# EAGLE board zx80 SD_12 (smd) build004 (EAGLE 9.6.2), part 1 of 2
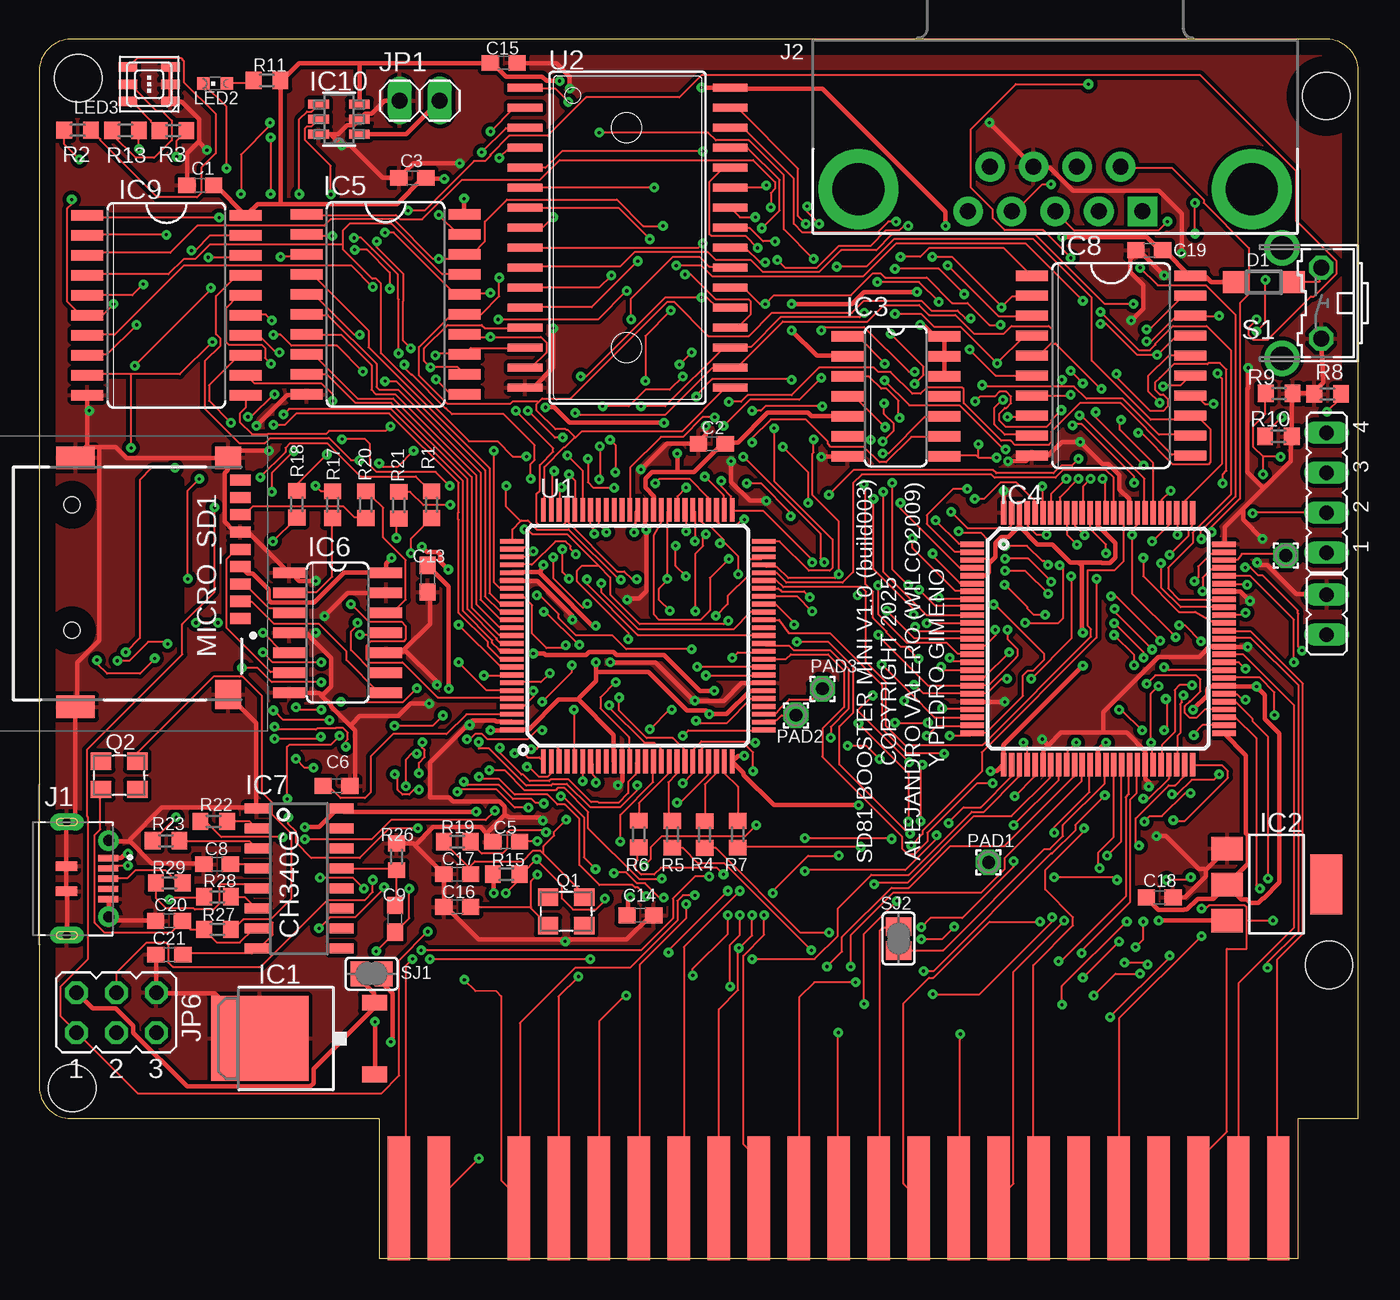
[diagram p0: board, top side]
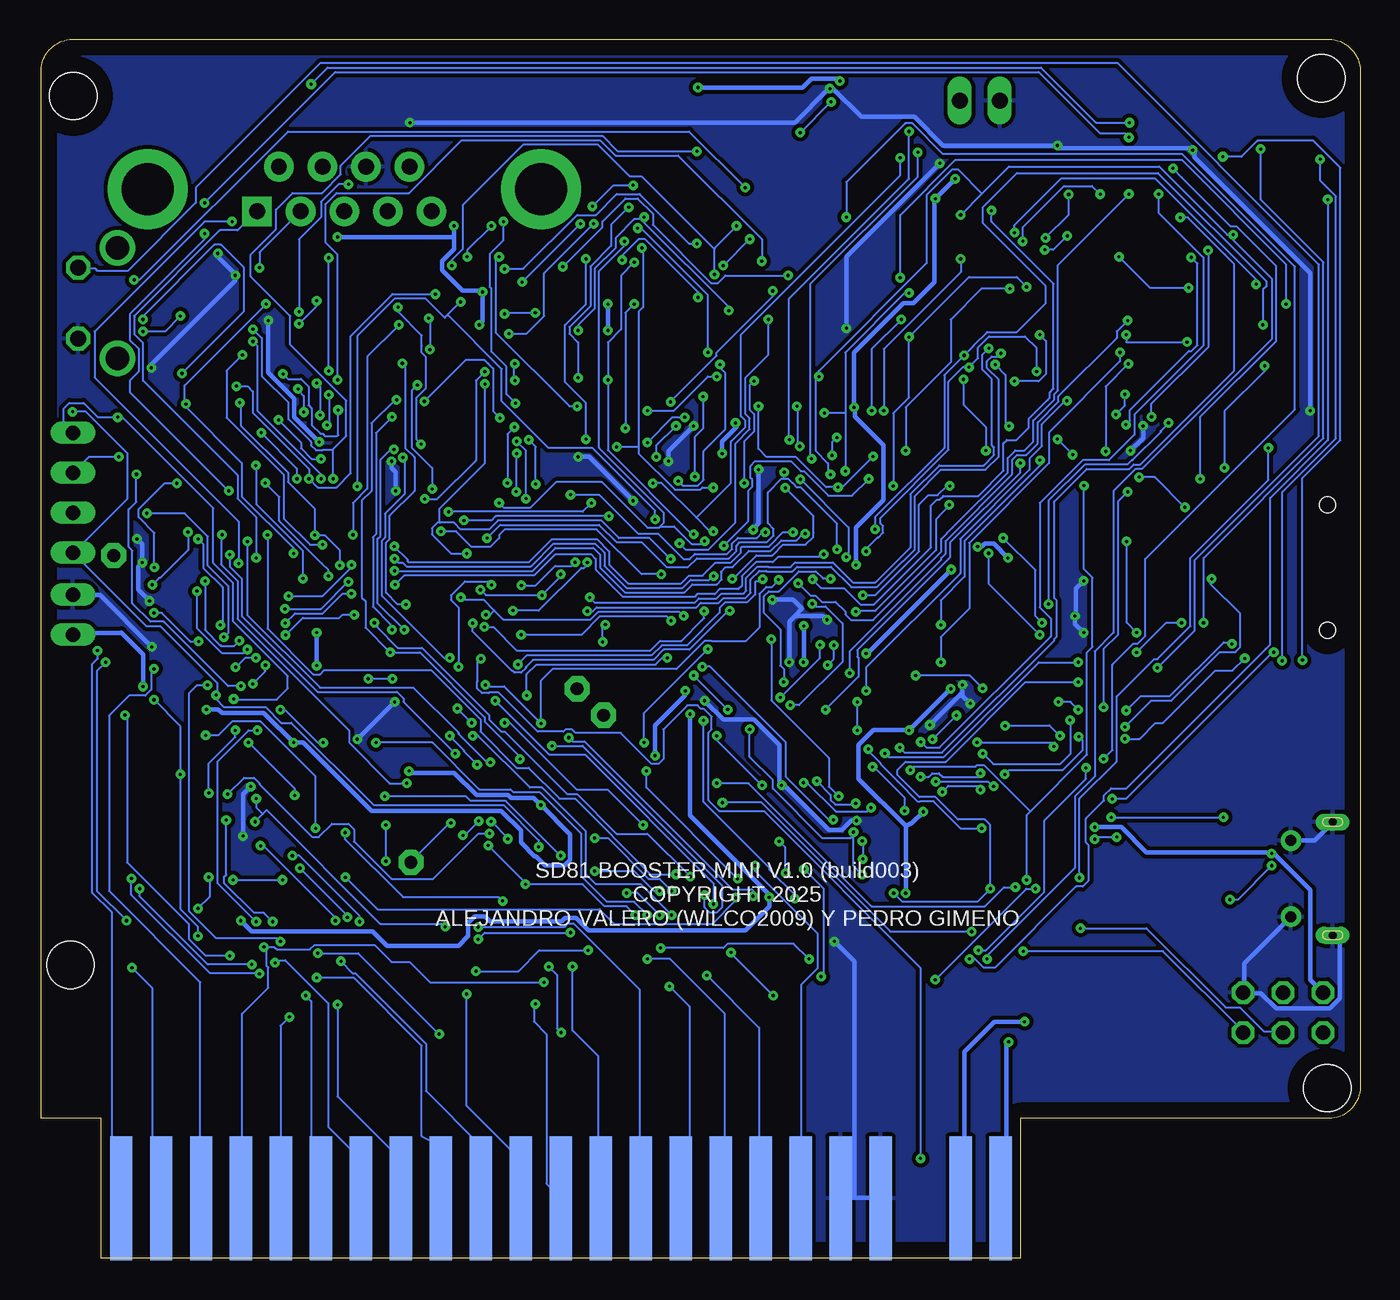
[diagram p1: board, bottom side, seen from below]

Size 83.82 x 77.47 mm. Coordinates in mm from the lower left corner, seen from the top.
Outline: 2,8.89 21.59,8.89 21.59,0 80.01,0 80.01,8.89 83.82,8.89 83.82,75.47 arc90 81.82,77.47 2,77.47 arc90 0,75.47 0,10.89 arc90 2,8.89
Copper layers (1*16): Top 0.035mm / dielectric 1.5mm / Bottom 0.035mm
Design rules "default *": minimum track width 5mil, minimum drill 0.2mm, track to track 6mil, track to pad 6mil, pad to pad 6mil, via to via 6mil, smd to smd 6mil, copper to edge 40mil, drill to drill 6mil, minimum pad ring 10mil, minimum via ring 8mil, stop-mask expansion 4mil, vias tented up to drill 999mil, thermal gap 10mil
Net classes: 1 VCC: width 0.3 mm; 2 3,3: width 0.3 mm
Holes 3 mm at 2.09,10.82 2.46,74.99 81.79,73.87 81.96,18.64

## Footprints (pad centres in the part's own frame; a part is rotated, then mirrored left to right if it is on the bottom)
EDGEPIN = smd 1.422 x 7.874: 1 0,0
C0603 = smd 1.1 x 1: 1 -0.85,0; 2 0.85,0
SOD123 = smd 1.4 x 1.4: A 1.9,0; C -1.9,0
TO252 = smd 1 x 1.6: 1 -2.28,-4.8; 2 2.28,-4.8 | smd 5.4 x 6.2: 3 0,2.5
SOT223 = smd 1.499 x 2.007: 1 -2.261,-3.15; 2 0.025,-3.15; 3 2.311,-3.15 | smd 3.81 x 2.007: 4 0,3.15
SO14 = smd 0.66 x 2.032: 1 -3.81,-3.073; 2 -2.54,-3.073; 3 -1.27,-3.073; 4 0,-3.073; 5 1.27,-3.073; 6 2.54,-3.073; 7 3.81,-3.073; 8 3.81,3.073; 9 2.54,3.073; 10 1.27,3.073; 11 0,3.073; 12 -1.27,3.073; 13 -2.54,3.073; 14 -3.81,3.073
TQFP100 = smd 1.5 x 0.345: 1 -8,6; 2 -8,5.5; 3 -8,5; 4 -8,4.5; 5 -8,4; 6 -8,3.5; 7 -8,3; 8 -8,2.5; 9 -8,2; 10 -8,1.5; 11 -8,1; 12 -8,0.5; 13 -8,0; 14 -8,-0.5; 15 -8,-1; 16 -8,-1.5; 17 -8,-2; 18 -8,-2.5; 19 -8,-3; 20 -8,-3.5; 21 -8,-4; 22 -8,-4.5; 23 -8,-5; 24 -8,-5.5; 25 -8,-6; 51 8,-6; 52 8,-5.5; 53 8,-5; 54 8,-4.5; 55 8,-4; 56 8,-3.5; 57 8,-3; 58 8,-2.5; 59 8,-2; 60 8,-1.5; 61 8,-1; 62 8,-0.5; 63 8,0; 64 8,0.5; 65 8,1; 66 8,1.5; 67 8,2; 68 8,2.5; 69 8,3; 70 8,3.5; 71 8,4; 72 8,4.5; 73 8,5; 74 8,5.5; 75 8,6 | smd 0.345 x 1.5: 26 -6,-8; 27 -5.5,-8; 28 -5,-8; 29 -4.5,-8; 30 -4,-8; 31 -3.5,-8; 32 -3,-8; 33 -2.5,-8; 34 -2,-8; 35 -1.5,-8; 36 -1,-8; 37 -0.5,-8; 38 0,-8; 39 0.5,-8; 40 1,-8; 41 1.5,-8; 42 2,-8; 43 2.5,-8; 44 3,-8; 45 3.5,-8; 46 4,-8; 47 4.5,-8; 48 5,-8; 49 5.5,-8; 50 6,-8; 76 6,8; 77 5.5,8; 78 5,8; 79 4.5,8; 80 4,8; 81 3.5,8; 82 3,8; 83 2.5,8; 84 2,8; 85 1.5,8; 86 1,8; 87 0.5,8; 88 0,8; 89 -0.5,8; 90 -1,8; 91 -1.5,8; 92 -2,8; 93 -2.5,8; 94 -3,8; 95 -3.5,8; 96 -4,8; 97 -4.5,8; 98 -5,8; 99 -5.5,8; 100 -6,8
SO20W = smd 0.66 x 2.032: 1 -5.715,-5.029; 2 -4.445,-5.029; 3 -3.175,-5.029; 4 -1.905,-5.029; 5 -0.635,-5.029; 6 0.635,-5.029; 7 1.905,-5.029; 8 3.175,-5.029; 9 4.445,-5.029; 10 5.715,-5.029; 11 5.715,5.029; 12 4.445,5.029; 13 3.175,5.029; 14 1.905,5.029; 15 0.635,5.029; 16 -0.635,5.029; 17 -1.905,5.029; 18 -3.175,5.029; 19 -4.445,5.029; 20 -5.715,5.029
SOIC16 = smd 0.635 x 1.524: 1 -4.445,-2.695; 2 -3.175,-2.695; 3 -1.905,-2.695; 4 -0.635,-2.695; 5 0.635,-2.695; 6 1.905,-2.695; 7 3.175,-2.695; 8 4.445,-2.695; 9 4.445,2.695; 10 3.175,2.695; 11 1.905,2.695; 12 0.635,2.695; 13 -0.635,2.695; 14 -1.905,2.695; 15 -3.175,2.695; 16 -4.445,2.695
SOT-23-6_MC = smd 1.321 x 0.559: 1 -1.295,0.95; 2 -1.295,0; 3 -1.295,-0.95; 4 1.295,-0.95; 5 1.295,0; 6 1.295,0.95
SHOUHAN_MICROXNJ = smd 0.4 x 1.25: 1 1.3,-4.375; 2 0.65,-4.375; 3 0,-4.375; 4 -0.65,-4.375; 5 -1.3,-4.375 | smd 0.6 x 1.35: S1 -0.8,-1.725; S2 0.8,-1.725 | drill 0.5 pad 1.07 long: S3 -3.6,-1.75; S6 3.6,-1.75 | drill 0.7 pad 1.3: S4 -2.425,-4.4; S5 2.425,-4.4
DB9_MALE = drill 1.016 pad 1.88 square: 1 5.54,-1.42 | drill 1.016 pad 1.88: 2 2.77,-1.42; 3 0,-1.42; 4 -2.77,-1.42; 5 -5.54,-1.42; 6 4.15,1.42; 7 1.38,1.42; 8 -1.38,1.42; 9 -4.15,1.42 | drill 3.302 pad 5.08: G1 -12.5,0; G2 12.5,0
1X02 = drill 1.016 long: 1 -1.27,0; 2 1.27,0
JP1 = drill 0.914 long: 1 0,-1.27; 2 0,1.27
JP4 = drill 0.914 long: 1 -3.81,0; 2 -1.27,0; 3 1.27,0; 4 3.81,0
JP3Q = drill 0.914 octagon: 1 -2.54,-1.27; 2 -2.54,1.27; 3 0,-1.27; 4 0,1.27; 5 2.54,-1.27; 6 2.54,1.27
CHIPLED_0603 = smd 0.8 x 0.8: A 0,-0.75; C 0,0.75
3535-PLCC6 = smd 1.2 x 0.6: P1 1.35,-1.1; P2 1.35,0; P3 1.35,1.1; P4 -1.35,1.1; P5 -1.35,0; P6 -1.35,-1.1
TF-01A = smd 0.7 x 1.3: 1 2.23,7.174; 2 1.13,7.174; 3 0.03,7.174; 4 -1.07,7.174; 5 -2.17,7.174; 6 -3.27,7.174; 7 -4.37,7.174; 8 -5.47,7.174; CD1 -6.57,7.174 | smd 1.448 x 1.651: MP1 -7.989,6.4 | smd 1.448 x 2.438: MP2 -7.989,-3.3; MP3 7.836,-3.3 | smd 1.854 x 1.651: MP4 7.061,6.4 | hole 1: -5.004,-3.531; 2.972,-3.531
1,6/0,8 = drill 0.813 pad 1.6 octagon: 1 0,0
3.2X2.5_KX-7 = smd 1.3 x 1.1: 1 -1.15,-0.9; 2 1.15,-0.9; 3 1.15,0.9; 4 -1.15,0.9
R0603 = smd 1 x 1.1: 1 -0.85,0; 2 0.85,0
B3F-31XX = drill 1.016 octagon: 1 -2.261,-1.245; 2 2.261,-1.245 | drill 1.499 pad 2.159: 3 -3.505,1.245; 4 3.505,1.245
SJ = smd 1.168 x 1.6: 1 -0.762,0; 2 0.762,0
TQFP100' = smd 1.5 x 0.3: 1 -8,6; 2 -8,5.5; 3 -8,5; 4 -8,4.5; 5 -8,4; 6 -8,3.5; 7 -8,3; 8 -8,2.5; 9 -8,2; 10 -8,1.5; 11 -8,1; 12 -8,0.5; 13 -8,0; 14 -8,-0.5; 15 -8,-1; 16 -8,-1.5; 17 -8,-2; 18 -8,-2.5; 19 -8,-3; 20 -8,-3.5; 21 -8,-4; 22 -8,-4.5; 23 -8,-5; 24 -8,-5.5; 25 -8,-6; 51 8,-6; 52 8,-5.5; 53 8,-5; 54 8,-4.5; 55 8,-4; 56 8,-3.5; 57 8,-3; 58 8,-2.5; 59 8,-2; 60 8,-1.5; 61 8,-1; 62 8,-0.5; 63 8,0; 64 8,0.5; 65 8,1; 66 8,1.5; 67 8,2; 68 8,2.5; 69 8,3; 70 8,3.5; 71 8,4; 72 8,4.5; 73 8,5; 74 8,5.5; 75 8,6 | smd 0.3 x 1.5: 26 -6,-8; 27 -5.5,-8; 28 -5,-8; 29 -4.5,-8; 30 -4,-8; 31 -3.5,-8; 32 -3,-8; 33 -2.5,-8; 34 -2,-8; 35 -1.5,-8; 36 -1,-8; 37 -0.5,-8; 38 0,-8; 39 0.5,-8; 40 1,-8; 41 1.5,-8; 42 2,-8; 43 2.5,-8; 44 3,-8; 45 3.5,-8; 46 4,-8; 47 4.5,-8; 48 5,-8; 49 5.5,-8; 50 6,-8; 76 6,8; 77 5.5,8; 78 5,8; 79 4.5,8; 80 4,8; 81 3.5,8; 82 3,8; 83 2.5,8; 84 2,8; 85 1.5,8; 86 1,8; 87 0.5,8; 88 0,8; 89 -0.5,8; 90 -1,8; 91 -1.5,8; 92 -2,8; 93 -2.5,8; 94 -3,8; 95 -3.5,8; 96 -4,8; 97 -4.5,8; 98 -5,8; 99 -5.5,8; 100 -6,8
SOP32-5 = smd 2.2 x 0.5: 1 -6.516,9.525; 2 -6.516,8.255; 3 -6.516,6.985; 4 -6.516,5.715; 5 -6.516,4.445; 6 -6.516,3.175; 7 -6.516,1.905; 8 -6.516,0.635; 9 -6.516,-0.635; 10 -6.516,-1.905; 11 -6.516,-3.175; 12 -6.516,-4.445; 13 -6.516,-5.715; 14 -6.516,-6.985; 15 -6.516,-8.255; 16 -6.516,-9.525; 17 6.516,-9.525; 18 6.516,-8.255; 19 6.516,-6.985; 20 6.516,-5.715; 21 6.516,-4.445; 22 6.516,-3.175; 23 6.516,-1.905; 24 6.516,-0.635; 25 6.516,0.635; 26 6.516,1.905; 27 6.516,3.175; 28 6.516,4.445; 29 6.516,5.715; 30 6.516,6.985; 31 6.516,8.255; 32 6.516,9.525

## Placement (x,y rotation side)
1A  D7  [EDGEPIN]  22.86,3.81 0 top
1B  VCC  [EDGEPIN]  22.86,3.81 180 bottom
2A  /RAMCS  [EDGEPIN]  25.4,3.81 0 top
2B  9V  [EDGEPIN]  25.4,3.81 180 bottom
4A  D0  [EDGEPIN]  30.48,3.81 0 top
4B  GND  [EDGEPIN]  30.48,3.81 180 bottom
5A  D1  [EDGEPIN]  33.02,3.81 0 top
5B  GND  [EDGEPIN]  33.02,3.81 180 bottom
6A  D2  [EDGEPIN]  35.56,3.81 0 top
6B  /CLOCK  [EDGEPIN]  35.56,3.81 180 bottom
7A  D6  [EDGEPIN]  38.1,3.81 0 top
7B  A0  [EDGEPIN]  38.1,3.81 180 bottom
8A  D5  [EDGEPIN]  40.64,3.81 0 top
8B  A1  [EDGEPIN]  40.64,3.81 180 bottom
9A  D3  [EDGEPIN]  43.18,3.81 0 top
9B  A2  [EDGEPIN]  43.18,3.81 180 bottom
10A  D4  [EDGEPIN]  45.72,3.81 0 top
10B  A3  [EDGEPIN]  45.72,3.81 180 bottom
11A  A6  [EDGEPIN]  48.26,3.81 0 top
11B  A15  [EDGEPIN]  48.26,3.81 180 bottom
12A  /NMI  [EDGEPIN]  50.8,3.81 0 top
12B  A14  [EDGEPIN]  50.8,3.81 180 bottom
13A  /HALT  [EDGEPIN]  53.34,3.81 0 top
13B  A13  [EDGEPIN]  53.34,3.81 180 bottom
14A  /MREQ  [EDGEPIN]  55.88,3.81 0 top
14B  A12  [EDGEPIN]  55.88,3.81 180 bottom
15A  /IORQ  [EDGEPIN]  58.42,3.81 0 top
15B  A11  [EDGEPIN]  58.42,3.81 180 bottom
16A  /RD  [EDGEPIN]  60.96,3.81 0 top
16B  A10  [EDGEPIN]  60.96,3.81 180 bottom
17A  /WR  [EDGEPIN]  63.5,3.81 0 top
17B  A9  [EDGEPIN]  63.5,3.81 180 bottom
18A  /BUSAK  [EDGEPIN]  66.04,3.81 0 top
18B  A8  [EDGEPIN]  66.04,3.81 180 bottom
19A  /WAIT  [EDGEPIN]  68.58,3.81 0 top
19B  A7  [EDGEPIN]  68.58,3.81 180 bottom
20A  /BUSRQ  [EDGEPIN]  71.12,3.81 0 top
20B  A6  [EDGEPIN]  71.12,3.81 180 bottom
21A  /RESET  [EDGEPIN]  73.66,3.81 0 top
21B  A5  [EDGEPIN]  73.66,3.81 180 bottom
22A  /M1  [EDGEPIN]  76.2,3.81 0 top
22B  A4  [EDGEPIN]  76.2,3.81 180 bottom
23A  /RFSH  [EDGEPIN]  78.74,3.81 0 top
23B  /ROMCS  [EDGEPIN]  78.74,3.81 180 bottom
C1  100nF  [C0603]  10.23,68.19 180 top
C2  100nF  [C0603]  42.74,51.77 180 top
C3  100nF  [C0603]  23.71,68.66 180 top
C5  22pF  [C0603]  29.67,26.47 0 top
C6  0.1uF  [C0603]  18.89,30.02 0 top
C8  0.1uF  [C0603]  11.3,25.05 0 top
C9  100nF  [C0603]  22.61,21.58 90 top
C13  0.1uF  [C0603]  24.68,43.19 270 top
C14  0.1uF  [C0603]  38.2,21.79 0 top
C15  100nF  [C0603]  29.51,75.98 0 top
C16  22pF  [C0603]  26.56,22.33 0 top
C17  22pF  [C0603]  26.55,24.42 0 top
C18  100nF  [C0603]  71.2,22.93 0 top
C19  100nF  [C0603]  70.54,64.07 180 top
C20  22pF  [C0603]  8.24,21.45 0 top
C21  22pF  [C0603]  8.27,19.3 0 top
D1  [SOD123]  77.81,62.03 0 top
IC1  7805DT  [TO252]  16.51,13.97 90 top
IC2  REG1117  [SOT223]  78.64,23.78 270 top
IC3  74ACT125D  [SO14]  54.43,54.78 270 top
IC4  XC95144XL-10TQG100C  [TQFP100]  67.28,39.38 0 top
IC5  74HC573D  [SO20W]  22.01,60.62 270 top
IC6  74LVC125  [SO14]  18.96,39.76 270 top
IC7  CH340G  [SOIC16]  16.51,24.13 270 top
IC8  74HC573D  [SO20W]  68.11,56.73 270 top
IC9  74HC573D  [SO20W]  8.08,60.57 270 top
IC10  MCP4725  [SOT-23-6_MC]  19.05,72.39 180 top
J1  MICROXNJ (C404969)  [SHOUHAN_MICROXNJ]  0,24.13 90 top
J2  JOYSTICK  [DB9_MALE]  64.57,67.96 0 top
JP1  [1X02]  24.18,73.58 0 top
JP2  [JP1]  81.81,40.91 0 top
JP3  JTAG  [JP4]  81.81,48.65 90 top
JP6  ICSP  [JP3Q]  4.89,15.62 0 top
LED2  SD  [CHIPLED_0603]  11.18,74.66 90 top
LED3  STATUS  [3535-PLCC6]  6.98,74.62 0 top
MICRO_SD1  TF-01A  [TF-01A]  5.6,42.89 270 top
PAD1  [1,6/0,8]  60.33,25.17 0 top
PAD2  [1,6/0,8]  48.08,34.51 0 top
PAD3  [1,6/0,8]  49.76,36.2 0 top
PAD6  P73  [1,6/0,8]  79.22,44.67 0 top
Q1  16MHz  [3.2X2.5_KX-7]  33.48,22.05 180 top
Q2  12MHz  [3.2X2.5_KX-7]  5.08,30.7 180 top
R1  0R  [R0603]  24.93,47.9 270 top
R2  150  [R0603]  2.44,71.69 0 top
R3  68  [R0603]  8.51,71.67 180 top
R4  180  [R0603]  42.28,26.93 270 top
R5  180  [R0603]  40.23,26.95 270 top
R6  100  [R0603]  38.1,26.97 270 top
R7  180  [R0603]  44.39,26.94 270 top
R8  330  [R0603]  81.87,54.93 0 top
R9  330  [R0603]  78.8,54.96 180 top
R10  330  [R0603]  78.74,52.24 180 top
R11  680  [R0603]  14.47,74.86 180 top
R13  150  [R0603]  5.48,71.67 180 top
R15  [R0603]  29.67,24.42 180 top
R17  3k3  [R0603]  18.65,47.9 270 top
R18  3k3  [R0603]  16.37,47.93 270 top
R19  1M  [R0603]  26.56,26.48 0 top
R20  3k3  [R0603]  20.75,47.9 270 top
R21  3k3  [R0603]  22.84,47.86 270 top
R22  1K  [R0603]  11.08,27.76 0 top
R23  1K  [R0603]  8.05,26.53 0 top
R26  1K  [R0603]  22.7,25.52 90 top
R27  1M  [R0603]  11.33,20.9 180 top
R28  22R  [R0603]  11.33,22.98 180 top
R29  22R  [R0603]  8.26,23.86 0 top
S1  RESET  [B3F-31XX]  80.22,60.71 90 top
SJ1  POWER_5V  [SJ]  21.12,18.08 180 top
SJ2  MC45  [SJ]  54.61,20.32 90 top
U1  ATMEGA2560AU  [TQFP100']  38.03,39.58 90 top
U2  AS6C4008  [SOP32-5]  37.38,64.86 0 top

## Library data of the parts
1A 1B 2A 2B 4A 4B 5A 5B 6A 6B 7A 7B 8A 8B 9A 9B 10A 10B 11A 11B 12A 12B 13A 13B 14A 14B 15A 15B 16A 16B 17A 17B 18A 18B 19A 19B 20A 20B 21A 21B 22A 22B 23A 23B PAD1-PAD3 PAD6 = wirepad
C1-C3 C5 C6 C8 C9 C13-C21 = rcl; SPICEPREFIX: C
D1 = diode
IC1 = linear
IC2 = burr-brown; MPN: REG1117; OC_FARNELL: 1097566; OC_NEWARK: 14P6981
IC3 IC5 IC6 IC8 IC9 = 74xx-eu
IC4 = XC95144XL-10TQG100C; AVAILABILITY: In Stock; DESCRIPTION: IC CPLD 144MC 10NS 100TQFP; MF: Xilinx Inc.; MP: XC95144XL-10TQG100C; PACKAGE: TQFP-100 Xilinx; PRICE: None; PURCHASE-URL: https://pricing.snapeda.com/search/part/XC95144XL-10TQG100C/?ref=eda
IC7 = ch340g
IC10 = MCP4725A2T-E_CH; AVAILABILITY: In Stock; CHECK_PRICES: https://www.snapeda.com/parts/MCP4725A2T-E/CH/Microchip/view-part/?ref=eda; DESCRIPTION: Microchip MCP4725A2T-E/CH, 12 bit Serial DAC, 3.4Msps, 6-Pin SOT-23 | Microchip Technology Inc. MCP4725A2T-E/CH; MF: Microchip; MP: MCP4725A2T-E/CH; PACKAGE: SOT-23-6 Microchip; PRICE: None; SNAPEDA_LINK: https://www.snapeda.com/parts/MCP4725A2T-E/CH/Microchip/view-part/?ref=snap
J1 = MICROXNJ; AVAILABILITY: Not in stock; CHECK_PRICES: https://www.snapeda.com/parts/MICROXNJ/Shouhan/view-part/?ref=eda; DESCRIPTION: Sensor Cables / Actuator Cables; MF: Shouhan; MP: MICROXNJ; PACKAGE: Package; PRICE: None; SNAPEDA_LINK: https://www.snapeda.com/parts/MICROXNJ/Shouhan/view-part/?ref=snap
J2 = SparkFun-Connectors; PROD_ID: CONN-09904
JP1 = pinhead
JP2 JP3 JP6 SJ1 SJ2 = jumper
LED2 LED3 = led
MICRO_SD1 = TF-01A; AVAILABILITY: Not in stock; CHECK_PRICES: https://www.snapeda.com/parts/TF-01A/HRO+Electronics+Co.%252C+Ltd./view-part/?ref=eda; DESCRIPTION: Standard Card Edge Connectors; MF: HRO Electronics Co., Ltd.; MP: TF-01A; PACKAGE: Package; PRICE: None; SNAPEDA_LINK: https://www.snapeda.com/parts/TF-01A/HRO+Electronics+Co.%252C+Ltd./view-part/?ref=snap
Q1 Q2 = crystal-geyer_V1_0
R1 R11 R17 R18 R20 R21 = rcl
R2-R10 R13 R15 R19 R22 R23 R26-R29 = rcl; SPICEPREFIX: R
S1 = switch-omron; MPN: B3F-3100; OC_FARNELL: 959704; OC_NEWARK: 36M3582
U1 = SparkFun-IC-Microcontroller; PROD_ID: IC-10040
U2 = AS6C4008-55SIN

## Nets
3V3 [VCC]: C18.1 IC2.2 IC4.5 IC4.26 IC4.38 IC4.51 IC4.57 IC4.88 IC4.98 IC6.14 JP2.1 MICRO_SD1.4 U1.25
5V [VCC]: 1B.1 SJ1.1
9V [VCC]: 2B.1 IC1.1
74573_OC: IC8.1 U1.16
/BUSAK: 18A.1
/BUSRQ: 20A.1
/CLOCK: 6B.1 IC4.22
/HALT: 13A.1 SJ2.2
/IORQ: 15A.1 IC4.43
/M1: 22A.1 IC4.61
/MEM_CE: IC4.97 U1.50 U2.22
/MEM_OE: IC4.12 U1.52 U2.24
/MREQ: 14A.1 IC4.41
/NMI: 12A.1 IC4.36
/OE_CTRL_CLOCK: IC3.10 IC4.10
/OE_IL: IC4.15 IC5.1
/OE_RAMCS: IC3.4 IC4.17
/OE_ROMCS: IC3.1 IC4.14
/RAMCS: 2A.1 IC3.6
/RD: 16A.1 IC4.49
/RESET: 21A.1 IC4.71 U1.15
/RFSH: 23A.1 IC4.64
/ROMCS: 23B.1 IC3.3
/WAIT: 19A.1 IC4.56 U1.42
/WR: 17A.1 IC4.52
/WR': IC4.13 U1.51 U2.29
A0: 7B.1 IC4.24
A0': IC4.2 IC8.12 U2.12
A1: 8B.1 IC4.28
A1': IC4.87 IC8.13 U2.11
A2: 9B.1 IC4.30
A2': IC4.89 IC8.14 U2.10
A3: 10B.1 IC4.33
A3': IC4.90 IC8.15 U2.9
A4: 22B.1 IC4.63
A4': IC4.91 IC8.16 U2.8
A5: 21B.1 IC4.60
A5': IC4.92 IC8.17 U2.7
A6: 11A.1 20B.1 IC4.34
A6': IC4.93 IC8.18 U2.6
A7: 19B.1 IC4.58
A7': IC4.94 IC8.19 U2.5
A8: 18B.1 IC4.55
A8': IC4.95 U1.53 U2.27
A9: 17B.1 IC4.53
A9': IC4.96 U1.54 U2.26
A10: 16B.1 IC4.50
A10': IC4.3 U1.55 U2.23
A11: 15B.1 IC4.46
A11': IC4.4 U1.56 U2.25
A12: 14B.1 IC4.42
A12': IC4.1 U1.57 U2.4
A13: 13B.1 IC4.40
A13': IC4.99 U1.58 U2.28
A14: 12B.1 IC4.37
A14': IC4.11 U1.59 U2.3
A15: 11B.1 IC4.35
A15': IC4.6 U1.60 U2.31
A16': IC4.7 U1.12 U2.2
A17': IC4.8 U1.48 U2.30
A18': IC4.9 U1.47 U2.1
ALE: IC8.11 U1.70
AREF: C6.1 U1.98
AUDIO: U1.39
B0: IC9.12 U1.97
B1: IC9.13 U1.96
B2: IC9.14 U1.95
B3: IC9.15 U1.94
B4: IC9.16 U1.93
B5: IC9.17 U1.92
B6: IC9.18 U1.91
B7: IC9.19 U1.90
CFG_CLK: IC4.54 U1.79
CFG_DATA: IC4.74 U1.68
CFG_RESET: IC4.59 U1.69
CS_LLS: IC6.8 MICRO_SD1.2
CTRL_CLK: IC3.9 U1.64
D0: 4A.1 IC4.18 IC5.12 IC8.9 IC9.9 U1.78 U2.13
D1: 5A.1 IC4.19 IC5.13 IC8.8 IC9.8 U1.77 U2.14
D2: 6A.1 IC4.20 IC5.14 IC8.7 IC9.7 U1.76 U2.15
D3: 9A.1 IC4.29 IC5.15 IC8.6 IC9.6 U1.75 U2.17
D4: 10A.1 IC4.32 IC5.16 IC8.5 IC9.5 U1.74 U2.18
D5: 8A.1 IC4.25 IC5.17 IC8.4 IC9.4 U1.73 U2.19
D6: 7A.1 IC4.23 IC5.18 IC8.3 IC9.3 U1.72 U2.20
D7: 1A.1 IC3.8 IC4.16 IC5.19 IC8.2 IC9.2 U1.71 U2.21
DI_LLS: IC6.3 MICRO_SD1.3
DO_LLC: IC6.12 R20.1
DOWN: IC4.66 J2.2
EN_M1_NOT: IC4.76 U1.40
FIRE: IC4.70 J2.6
GET_CTRL_REG: IC4.86 U1.46
GET_DATA_REG: IC4.85 U1.45
GND [VCC]: 4B.1 5B.1 C1.2 C2.2 C3.2 C5.1 C6.2 C8.1 C13.2 C14.2 C15.2 C16.1 C17.1 C18.2 C19.2 C20.1 C21.1 IC1.3 IC2.1 IC3.7 IC4.21 IC4.31 IC4.44 IC4.62 IC4.69 IC4.75 IC4.84 IC4.100 IC5.10 IC6.1 IC6.4 IC6.7 IC6.10 IC6.13 IC7.1 IC8.10 IC9.10 IC10.2 IC10.6 J1.5 J1.S1 J1.S2 J1.S3 J1.S4 J1.S5 J1.S6 J2.8 JP1.1 JP2.2 JP6.6 LED3.P1 LED3.P2 LED3.P3 MICRO_SD1.6 MICRO_SD1.MP1 MICRO_SD1.MP2 MICRO_SD1.MP3 MICRO_SD1.MP4 R8.1 R9.1 R10.1 R26.2 S1.1 U1.11 U1.32 U1.62 U1.81 U1.99 U2.16
LE_IL: IC5.11 U1.5
LE_OL: IC4.72 IC9.11
LEDB: R3.1 U1.7
LEDG: R13.1 U1.1
LEDR: R2.1 U1.6
LEFT: IC4.67 J2.3
MISO: JP6.1 R1.1 U1.22
MOSI: JP6.4 R17.1 U1.21
N$1: IC6.2 R17.2
N$2: PAD2.1 U1.27
N$3: IC6.11 R1.2
N$4: IC7.2 R22.2
N$5: PAD3.1 U1.28
N$9: IC6.5 R18.2
N$12: IC7.3 R23.2
N$13: MICRO_SD1.7 R20.2
N$14: IC6.9 R21.2
N$15: LED2.A R11.2
N$23: IC4.73 PAD6.1
N$24: IC4.27 PAD1.1
N$26: LED3.P4 R2.2
N$27: LED3.P6 R3.2
N$28: LED3.P5 R13.2
N$30: C8.2 IC7.4
N$31: C20.2 IC7.7 Q2.3 R27.2
N$32: C21.2 IC7.8 Q2.1 R27.1
N$33: IC4.39 SJ2.1
N$36: C16.2 Q1.3 R19.2 U1.33
N$37: C17.2 Q1.1 R19.1 U1.34
N$39: C9.2 IC7.13 R26.1
N$41: J1.2 R28.2
N$42: J1.3 R29.2
O0: IC5.9 U1.89
O1: IC5.8 U1.88
O2: IC5.7 U1.87
O3: IC5.6 U1.86
O4: IC5.5 U1.85
O5: IC5.4 U1.84
O6: IC5.3 U1.83
O7: IC5.2 U1.82
OE_OL: IC9.1 U1.13
PAGE_A8: IC4.80 U1.41
RD+: IC7.5 R29.1
RD-: IC7.6 R28.1
RESET: C5.2 C9.1 D1.A JP6.5 R15.1 S1.2 U1.30
RIGHT: IC4.68 J2.4
ROM_WR_EN: IC4.79 U1.36
RST_CTRL_REG: IC4.82 U1.26
RST_DATA_REG: IC4.81 U1.63
RX0: R23.1 U1.3
SCK_LLS: IC6.6 MICRO_SD1.5
SCL: IC10.5 U1.43
SCLK: JP6.3 R18.1 U1.20
SD_LED: LED2.C U1.37
SDA: IC10.4 U1.44
SEL_128CHARS: IC4.78 U1.35
SPARE1: IC4.77 U1.38
SPEAKER: IC10.1 JP1.2
SS_SD: R21.1 U1.19
TCK: IC4.48 JP3.1 R7.2 R8.2
TCK': R7.1 U1.24
TDI: IC4.45 JP3.3 R5.2 R9.2
TDI': R5.1 U1.18
TDO: IC4.83 JP3.2 R6.2
TDO': R6.1 U1.17
TMS: IC4.47 JP3.4 R4.2 R10.2
TMS': R4.1 U1.23
TX0: R22.1 U1.2
UP: IC4.65 J2.1
VCC [VCC]: C1.1 C2.1 C3.1 C13.1 C14.1 C15.1 C19.1 D1.C IC1.2 IC2.3 IC3.2 IC3.5 IC3.12 IC3.13 IC3.14 IC5.20 IC7.16 IC8.20 IC9.20 IC10.3 J1.1 JP6.2 R11.1 R15.2 SJ1.2 U1.10 U1.31 U1.61 U1.80 U1.100 U2.32

## Tracks (layer width: path | path; a pad name or v marks a point on that pad's centre or on a via)
3V3  (via drill 0.2)
  Top 0.3: IC4.51 76.69,31.97 76.69,27.02 76.8,26.91 76.8,25.03 76.77,25.03 IC2.2 75.49,23.72 | 75.49,23.72 74.61,22.84 73.61,22.84 72.94,22.16 72.76,22.16 72.72,22.13 71.1,22.13 70.37,22.86 70.37,22.91 C18.1 | 75.49,23.72 76.4,22.81 76.74,22.81 76.96,22.59 77.47,22.59 77.77,22.88 77.82,22.88 78.82,23.88 78.82,33.35 77.89,34.27 77.89,35.8 v77.36,36.34 76.17,36.34 76.16,36.35 75.31,36.35 IC4.57 75.26,36.35 74.41,36.35 74.23,36.18 74.23,35.78 v73.32,34.87 | IC4.5 59.31,43.4 60.16,43.4 60.33,43.58 60.33,44.16 60.76,44.58 60.76,45.47 61.14,45.84 61.6,45.84 62.28,46.53 | 66.04,44.23 65.51,44.23 64.37,45.38 63.44,45.38 62.28,46.53 | 66.04,44.23 67.49,44.23 67.53,44.19 68.04,44.19 68.39,44.54 68.39,45.47 67.54,46.33 67.48,46.33 67.28,46.53 IC4.88 | v66.32,39.76 66.32,39.98 66.26,40.04 66.26,44.02 66.04,44.23 | 62.28,46.53 IC4.98 62.28,46.53 | v22.38,44.51 22.03,44.16 IC6.14 19.38,43.57 17.47,41.67 14.74,41.67 14.57,41.85 14.57,42.49 13.55,43.51 13.22,43.51 MICRO_SD1.4 | v24.31,45.23 24.65,44.89 25.3,44.89 25.48,44.72 25.48,44.28 v25.98,43.77 | v44.81,31.94 44.39,31.94 U1.25 44.76,30.85 44.76,30.71 46.67,28.8 v52.07,28.8 | IC4.38 67.28,32.28 v67.79,32.78 | v60.45,30.96 60.87,30.96 IC4.26 61.28,32.63 v66.32,37.67 | v42.9,36.06 41.98,36.06 39.69,38.35 36.67,38.35 36.5,38.52 34.93,38.52 34.76,38.34 32.16,38.34 32.06,38.44 v31.39,38.44
  Bottom 0.3: v66.32,39.76 v66.32,37.67 | v24.31,45.23 24.05,45.23 23.86,45.41 23.28,45.41 v22.38,44.51 | v60.45,30.96 60.34,30.86 57.58,30.86 56.17,29.44 54.15,29.44 53.96,29.25 52.53,29.25 v52.07,28.8 50.21,26.93 50.21,25.33 50.56,24.98 51.81,24.98 52.37,25.54 52.46,25.54 53.34,26.42 53.34,27.18 54.59,28.43 62.84,28.43 67.19,32.78 v67.79,32.78 68.68,33.67 68.72,33.67 69.69,34.65 72.34,34.65 72.56,34.87 v73.32,34.87 | v25.98,43.77 31.32,38.44 v31.39,38.44 | v42.9,36.06 42.9,35.77 44.81,33.86 v44.81,31.94 | JP2.1 81.69,39.75 78.73,39.75 78.73,39.76 77.36,38.38 v77.36,36.34
5V  (via drill 0.2)
  Top 0.3: v22.34,13.75 22.45,13.86 22.45,16.85 21.9,17.41 21.9,18.04 SJ1.1
  Bottom 0.3: v22.34,13.75 22.47,13.62 22.47,4.23 22.86,3.84 1B.1
9V  (via drill 0.2)
  Top 0.3: v21.34,15.04 21.34,11.75 IC1.1
  Bottom 0.3: v21.34,15.04 23.25,15.04 25.16,13.13 25.16,5.97 25.38,5.76 25.38,3.84 2B.1
74573_OC  (via drill 0.2)
  Top 0.127: v36.21,35.15 36.21,35.01 38.45,32.78 39.08,32.78 39.5,32.36 39.5,31.59 U1.16 | v34.83,41.59 34.56,41.33 32.65,43.24 v32.65,44.56 | v35.62,51.61 35.62,49.51 v35.58,49.51 | v35.8,54.15 37.47,54.15 38.52,55.2 40.06,55.2 v40.89,56.04 | v45.3,53.87 45.85,53.87 46.13,54.15 v49.77,54.15 | v54.72,63.65 55.98,63.65 56.54,64.21 61.29,64.21 63.04,62.47 IC8.1
  Bottom 0.127: v36.21,35.15 35.66,35.15 32.9,37.91 32.9,40.35 33.98,41.43 34.66,41.43 v34.83,41.59 | v32.65,44.56 32.51,44.7 32.51,46.45 v35.58,49.51 | v35.8,54.15 35.75,54.1 35.75,51.73 v35.62,51.61 | v40.89,56.04 41.45,56.04 43.62,53.87 v45.3,53.87 | v49.77,54.15 50.25,54.15 54.93,58.83 54.93,63.44 v54.72,63.65
/CLOCK  (via drill 0.2)
  Top 0.127: v57.38,34.94 59.27,34.94 IC4.22 | v54.38,34.04 v56.47,34.04 | v45.57,27.54 44.88,26.84 39.57,26.84 38.87,26.14 38.87,25.38 v38.45,24.96
  Bottom 0.127: v56.47,34.04 v57.38,34.94 | v54.38,34.04 54.03,34.04 49.77,29.78 47.81,29.78 v45.57,27.54 | v38.45,24.96 38.45,24.61 34.47,20.62 34.47,18.46 35.5,17.42 35.5,3.84 6B.1
/HALT
  Top 0.127: 13A.1 53.39,3.87 53.39,20.82 53.62,21.04 54.58,21.04 SJ2.2
/IORQ  (via drill 0.2)
  Top 0.127: v66.25,19.39 66.25,19.58 69.32,22.65 69.32,29.15 69.74,29.57 69.74,31.31 IC4.43 | v58.53,14.24 58.53,13.91 58.48,13.86 58.48,3.84 15A.1
  Bottom 0.127: v66.25,19.39 | v58.53,14.24 63.68,19.39 v66.25,19.39
/M1
  Top 0.127: IC4.61 75.33,38.37 76.52,38.37 79.75,35.13 79.75,21.03 76.22,17.5 76.22,3.84 22A.1
/MEM_CE  (via drill 0.2)
  Top 0.127: v46.69,52.76 46.69,49.4 50.41,45.68 50.41,43.87 50.25,43.71 48.9,43.71 47.04,45.56 46.06,45.56 U1.50 | U2.22 43.97,61.63 44.81,61.63 45.78,60.65 v46.13,60.65 46.69,61.21 51.58,61.21 52.98,62.61 53.47,62.61 53.75,62.33 56.4,62.33 58.01,60.72 58.98,60.72 60.38,59.32 v61.08,59.32 | v64.01,45.98 63.39,45.98 62.83,46.54 62.83,47.38 IC4.97
  Bottom 0.127: v46.69,52.76 46.69,60.09 v46.13,60.65 | v64.01,45.98 64.01,48.01 63.11,48.91 63.11,57.3 v61.08,59.32
/MEM_OE  (via drill 0.2)
  Top 0.127: IC4.12 59.24,39.83 55.94,39.83 55.67,40.11 v55.67,40.13 | v46.13,63.3 45.78,63.3 44.88,64.21 43.97,64.21 U2.24 | v42.29,49.68 43.48,48.49 43.48,47.59 U1.52 | v41.75,54.77 41.75,54.86 42.76,55.86 47.78,55.86 v47.81,55.83 | v41.69,41.13 41.69,44.79 42.18,45.28 42.18,45.83 42.34,45.99 42.34,46 v42.36,46.02
  Bottom 0.127: v55.67,40.13 55.65,40.11 55.09,40.11 53.6,38.62 45.11,38.62 44.49,39.23 43.14,39.23 41.82,40.55 41.69,40.68 v41.69,41.13 | v42.36,46.02 42.39,46.02 42.44,46.07 42.52,46.07 47.81,51.36 v47.81,55.83 47.81,58.2 46.97,59.04 46.97,62.47 v46.13,63.3 | v42.29,49.68 42.29,52.2 41.75,52.73 v41.75,54.77
/MREQ  (via drill 0.2)
  Top 0.127: v67.86,25.58 68.76,26.49 68.76,31.31 IC4.41 | v63.59,21.39 60.38,21.39 56.82,17.83 56.54,17.83 54.92,16.21 54.92,4.75 55.83,3.84 14A.1
  Bottom 0.127: v67.86,25.58 67.81,25.63 67.47,25.63 63.59,21.76 v63.59,21.39
/NMI  (via drill 0.2)
  Top 0.127: v51.57,18.52 51.57,20.54 54.28,23.25 59.86,23.25 61.36,24.75 61.36,25.44 66.25,30.33 66.25,31.31 IC4.36 | v50.78,14.34 50.92,14.2 50.73,14.01 50.73,3.91 50.8,3.84 12A.1
  Bottom 0.127: v51.57,18.52 51.05,18.01 51.05,14.61 v50.78,14.34
/OE_CTRL_CLOCK  (via drill 0.2)
  Top 0.127: v53.64,48.73 53.63,48.71 53.63,43.64 56.39,40.88 59.27,40.88 IC4.10 | v53.61,51.15 53.96,51.15 56.26,53.45 57.45,53.45 IC3.10
  Bottom 0.127: v53.61,51.15 53.64,51.11 v53.64,48.73
/OE_IL  (via drill 0.2)
  Top 0.127: v53.31,42.77 | v53.31,42.77 53.31,40.93 55.11,39.14 57.66,39.14 58.36,38.44 59.27,38.44 IC4.15 | v49.89,44.24 49.63,44.5 49.63,46.05 v44.74,50.94 | v43.48,52.9 45.16,54.57 48.3,54.57 v49.69,55.97 | v46.48,66.8 46.48,67.7 46.76,67.98 46.76,68.4 45.36,69.8 33.07,69.8 31.81,68.54 26.85,68.54 24.34,66.03 22.94,66.03 22.66,66.31 17.01,66.31 IC5.1
  Bottom 0.127: v53.31,42.77 52.39,42.77 51.15,44.01 50.12,44.01 v49.89,44.24 | v44.74,50.94 44.74,51.64 v43.48,52.9 | v49.69,55.97 49.69,58.2 50.25,58.76 50.25,59.18 48.93,60.51 48.93,63.02 47.6,64.35 47.6,65.68 v46.48,66.8
/OE_RAMCS  (via drill 0.2)
  Top 0.127: v57.31,37.6 57.52,37.39 59.27,37.39 IC4.17 | v54.2,49.28 54.19,49.27 54.19,43.81 v55.2,42.8 | v53.75,52.83 51.86,54.71 51.37,54.71 IC3.4
  Bottom 0.127: v57.31,37.6 57.31,41.37 57.78,41.84 57.78,42.13 56.89,43.02 55.42,43.02 v55.2,42.81 v55.2,42.8 | v54.2,49.28 54.2,52.37 v53.75,52.83
/OE_ROMCS  (via drill 0.2)
  Top 0.127: v60.75,39.95 60.75,39.57 60.1,38.92 59.33,38.92 IC4.14 | v61.41,51.4 61.29,51.4 58.48,54.21 55.29,54.21 v53.72,55.79 | v53.72,56.85 53.72,56.91 52.08,58.55 51.37,58.55 IC3.1
  Bottom 0.127: v61.41,51.4 61.62,51.4 62.27,50.75 62.27,45.91 62.46,45.72 62.46,41.66 v60.75,39.95 | v53.72,55.79 53.82,55.79 53.82,56.76 v53.72,56.85
/RAMCS  (via drill 0.2)
  Top 0.127: 2A.1 v27.94,6.35 | v55.88,38.1 55.12,38.86 54.75,38.86 53.85,39.76 53.85,39.84 52.98,40.7 52.98,42.36 52.49,42.85 52.49,49.11 v52.4,49.2 | v52.85,52.03 51.56,52.03 IC3.6
  Bottom 0.127: v27.94,6.35 27.94,18.45 37.91,28.42 40.75,28.42 40.75,28.44 41.41,29.11 41.41,33.41 41.21,33.61 41.21,34.43 41.7,34.91 41.88,34.91 42.1,35.14 42.76,35.14 44.29,33.61 44.29,31.73 44.59,31.42 45.02,31.42 46.99,33.39 49.86,33.39 50.08,33.61 50.51,33.61 50.64,33.48 52.27,33.48 54.75,35.95 55.36,35.95 55.39,35.92 55.82,35.92 56.12,36.23 56.12,36.66 56.08,36.7 56.08,37.9 v55.88,38.1 | v52.4,49.2 52.4,51.58 v52.85,52.03
/RD  (via drill 0.2)
  Top 0.127: v69.88,26.21 69.67,26.42 69.67,27.96 71.77,30.05 72.19,30.05 72.75,30.61 72.75,31.31 IC4.49 | v65.13,21.46 65.13,21.44 61.91,18.21 61.91,4.75 61,3.84 16A.1
  Bottom 0.127: v65.13,21.46 65.13,21.67 69.67,26.21 v69.88,26.21
/RESET  (via drill 0.2)
  Top 0.127: v36.92,26.49 36.92,28.18 39.01,30.26 39.01,31.52 U1.15 | v68.48,24.05 68.32,24.21 v64.49,24.21 | v71.63,24.05 73.18,24.05 v73.18,24.23 | v73.86,22.23 74.14,22.23 74.35,22.44 76.59,22.44 76.73,22.3 76.73,21.46 | 76.73,21.46 76.73,19.67 75.47,19.67 75.47,8.05 73.71,6.29 73.71,3.84 21A.1 | v79.73,37.88 79.73,40.58 76.96,43.35 75.31,43.35 IC4.71 | 76.73,21.46 v78.4,21.46 | v39.69,22.91 39.42,22.91 38.5,23.84 37.98,23.84 37.3,24.53 36.56,24.53 v36.52,24.48
  Bottom 0.127: v36.52,24.48 36.57,24.54 36.57,26.14 v36.92,26.49 | v39.69,22.91 39.69,22.74 41.17,21.25 47.41,21.25 48.33,22.18 62.45,22.18 v64.49,24.21 | v71.63,24.05 v68.48,24.05 | v73.18,24.23 73.12,24.17 73.12,22.97 v73.86,22.23 | v79.73,37.88 80.29,37.32 80.29,23.35 v78.4,21.46
/RFSH
  Top 0.127: IC4.64 75.33,39.83 77.01,39.83 80.31,36.53 80.31,20.63 78.68,19 78.68,3.9 78.74,3.84 23A.1
/ROMCS  (via drill 0.2)
  Top 0.127: v80.25,38.62 80.01,38.86 80.01,40.96 79.99,40.98 79.99,41.17 77.75,43.41 77.47,43.41 76.97,43.9 v76.64,43.9 | v75.2,49.26 75.2,49.8 75.45,50.05 75.45,56.48 75.02,56.91 74.33,56.91 74.24,56.82 72.09,56.82 71.22,55.95 71.2,55.95 70.9,55.64 70.9,55.21 71.21,54.9 71.42,54.9 71.72,54.59 71.72,54.16 71.42,53.86 70.6,53.86 68.46,56 v68.46,56.2 | v64.95,53.91 64.31,53.27 64.31,53.14 64.01,52.83 61.43,52.83 61.01,53.25 61.01,53.68 61.36,54.04 61.45,54.04 61.76,54.34 61.76,54.77 61.45,55.07 61.02,55.07 60.71,54.77 59.78,54.77 v59.47,54.46 | v54.67,53.4 54.61,53.47 54.61,54.5 53.84,55.27 53.5,55.27 52.73,56.05 IC3.3
  Bottom 0.127: 23B.1 79.34,4.42 79.34,22.01 80.57,23.23 80.57,37.77 80.22,38.12 80.22,38.6 v80.25,38.62 | v76.64,43.9 76.64,46.11 77.63,47.1 77.63,47.61 75.99,49.26 v75.2,49.26 | v68.46,56.2 68.14,55.88 67.31,55.88 66.84,55.41 66.84,54.21 66.62,53.99 66.62,52.95 66.07,52.4 65.93,52.4 65.8,52.26 65.01,52.26 64.95,52.32 v64.95,53.91 | v59.47,54.46 56.82,57.11 55.68,57.11 55.43,56.87 55.41,56.87 55.1,56.56 55.1,53.83 v54.67,53.4
/WAIT  (via drill 0.2)
  Top 0.127: v47.97,40.27 47.97,40.38 46.85,41.51 46.06,41.51 U1.42 | v48.15,39.18 50.14,39.18 51.72,37.59 51.72,34.69 50.84,33.81 50.84,31.38 55.22,27.01 55.31,27.01 v55.33,26.99 | v71.98,29.5 72.33,29.5 73.23,30.4 74.63,30.4 v74.98,30.75 | v76.66,35.5 76.45,35.5 76.1,35.85 75.33,35.85 IC4.56 | v73.86,20.48 68.61,15.23 68.61,3.84 19A.1
  Bottom 0.127: v48.15,39.18 48.15,40.16 48,40.3 v47.97,40.27 | v55.33,26.99 56.04,26.99 58.92,24.12 61.57,24.12 63.94,26.49 63.94,27.26 64.29,27.61 65.34,27.61 66.18,26.77 66.6,26.77 69.95,30.12 69.95,30.19 70.3,30.54 70.93,30.54 v71.98,29.5 | v76.66,35.5 74.98,33.83 v74.98,30.75 74.98,22.2 73.86,21.08 v73.86,20.48
/WR  (via drill 0.2)
  Top 0.127: v73.37,33.23 73.37,33.32 73.93,33.88 IC4.52 | v66.39,27.33 66.39,27.13 63.93,24.67 63.93,23.43 65.69,21.67 65.69,21.16 63.16,18.63 63.16,4.12 63.44,3.84 17A.1
  Bottom 0.127: v73.37,33.23 72.57,33.23 71.7,34.11 69.88,34.11 66.39,30.61 v66.39,27.33
/WR'  (via drill 0.2)
  Top 0.127: v53.85,41.16 55.59,39.41 59.27,39.41 IC4.13 | v49.12,44.23 49.12,44.39 45.99,47.52 44.04,47.52 U1.51 43.97,47.59 43.97,48.42 43.34,49.05 v43.34,49.4 | v45.92,65.47 47.04,66.59 47.04,68.54 45.02,70.57 43.97,70.57 U2.29 | v40.68,56.81 v41.45,57.58
  Bottom 0.127: v53.85,41.16 52.21,41.16 49.49,43.88 49.34,43.88 49.12,44.1 v49.12,44.23 | v45.92,65.47 45.71,65.47 41.45,61.21 v41.45,57.58 | v40.68,56.81 40.68,56.6 40.33,56.25 40.33,52.69 41.73,51.29 41.73,49.47 42.08,49.12 43.06,49.12 v43.34,49.4
A0  (via drill 0.2)
  Top 0.127: v56.4,33.2 57.03,33.83 59.27,33.83 IC4.24 | v43.76,21.81 43.76,20.62 41.52,18.39 v41.52,17.97
  Bottom 0.127: v56.4,33.2 56.05,33.2 52.77,29.91 52,29.91 49.21,27.12 49.21,24.4 48.58,23.77 45.71,23.77 v43.76,21.81 | v41.52,17.97 38.2,14.65 38.2,6.33 38.16,6.29 38.16,3.84 7B.1
A0'  (via drill 0.2)
  Top 0.127: v58.98,48.9 58.07,48.9 56.4,47.22 56.4,46.68 58.15,44.93 59.27,44.93 IC4.2 | 64.99,55.41 60,55.41 v59.92,55.49 | 64.99,55.41 65.76,55.41 66.55,54.62 68.87,54.62 71.16,52.34 73.09,52.34 IC8.12 | v38.03,63.37 35.1,60.44 30.91,60.44 U2.12 | 64.99,55.41 v64.99,55.83
  Bottom 0.127: v58.98,48.9 58.98,50.23 60.28,51.53 60.28,55.14 v59.92,55.49 | v38.03,63.37 38.03,64.77 43.34,70.08 47.32,70.08 48.3,71.06 57.1,71.06 60.45,67.7 65.06,67.7 65.76,67 65.76,64.56 64.99,63.79 v64.99,55.83
A1  (via drill 0.2)
  Top 0.127: v45.3,19.02 49.28,19.02 50.74,20.48 50.74,22.23 52.88,24.37 55.26,24.37 59.27,28.38 60.03,28.38 62.27,30.61 62.27,31.31 IC4.28
  Bottom 0.127: v45.3,19.02 43.86,19.02 40.41,15.57 40.41,4.04 8B.1
A1'  (via drill 0.2)
  Top 0.127: v67.58,49.54 67.72,49.4 67.72,47.45 IC4.87 | v69.84,52.47 70.03,52.47 72.05,50.45 74.28,50.45 74.42,50.59 74.42,52.69 73.58,53.52 73.17,53.52 IC8.13 72.87,53.29 70.63,53.29 66.88,57.05 66.88,61.07 63.18,64.77 54.31,64.77 52.56,63.02 v50.67,63.02 | v36.35,62.47 35.58,61.7 30.91,61.7 U2.11
  Bottom 0.127: v67.58,49.54 67.58,50.2 v69.84,52.47 | v36.35,62.47 40.33,62.47 40.82,61.98 41.24,61.98 44.94,65.68 44.94,66.38 45.92,67.35 46.69,67.35 48.16,65.89 48.16,65.54 v50.67,63.02
A2  (via drill 0.2)
  Top 0.127: v61.99,29.36 63.25,30.61 63.25,31.31 IC4.30 | v50.81,25.58 48.86,25.58 46.62,23.35 v46.62,23.21 | v44.53,21.81 44.53,20.55 43.9,19.93 v43.9,17.27
  Bottom 0.127: v61.99,29.36 56.83,29.36 56.55,29.08 54.31,29.08 v50.81,25.58 | v46.62,23.21 45.92,23.21 v44.53,21.81 | v43.9,17.27 42.63,16 42.63,4.33 43.12,3.84 9B.1
A2'  (via drill 0.2)
  Top 0.127: v67.79,44.79 67.79,45.37 66.81,46.35 66.81,47.38 IC4.89 | v74.63,54.3 74.07,54.3 73.58,54.78 73.17,54.78 IC8.14 | v69.53,60.65 67.72,60.65 63.32,65.05 54.17,65.05 53.19,64.07 50.95,64.07 49.56,62.67 45.99,62.67 45.22,63.44 42.99,63.44 42.5,63.93 37.82,63.93 36.91,63.02 30.91,63.02 U2.10
  Bottom 0.127: v67.79,44.79 67.79,45.14 71.07,48.42 71.07,50.54 74.74,54.21 74.71,54.21 v74.63,54.3 74.71,54.3 74.71,55.47 v69.53,60.65
A3  (via drill 0.2)
  Top 0.127: v61.92,27.54 64.78,30.4 64.78,31.31 IC4.33 | v61.92,25.23 61.92,24.89 58.66,21.63 56.63,21.63 v56.05,21.04
  Bottom 0.127: v61.92,25.23 v61.92,27.54 | v56.05,21.04 50.6,21.04 50.39,21.25 49.97,21.25 45.77,17.05 45.77,3.84 10B.1
A3'  (via drill 0.2)
  Top 0.127: v66.81,49.54 66.32,49.05 66.32,47.45 IC4.90 | v71.42,55.43 71.46,55.47 72.53,55.47 73.09,56.04 IC8.15 | v42.15,64.49 41.87,64.21 30.91,64.21 U2.9 | v54.38,62.88 57.17,62.88 v58.78,61.28
  Bottom 0.127: v71.42,55.43 71.37,55.43 71.36,55.42 70.7,55.42 70.37,55.09 70.37,53.73 66.81,50.17 v66.81,49.54 66.25,48.98 65.06,48.98 64.15,49.89 64.15,58.62 61.5,61.28 v58.78,61.28 | v42.15,64.49 42.64,64.49 45.78,67.63 47.25,67.63 48.58,66.31 49.77,66.31 53.19,62.88 v54.38,62.88
A4  (via drill 0.2)
  Top 0.127: v78.05,18.46 78.05,18.81 80.03,20.79 80.03,36.39 77.01,39.41 75.33,39.41 IC4.63
  Bottom 0.127: v78.05,18.46 76.78,17.19 76.78,4.4 76.22,3.84 22B.1
A4'  (via drill 0.2)
  Top 0.127: v66.44,45.95 66.41,45.95 65.83,46.54 65.83,47.38 IC4.91 | v71.21,54.38 70.46,55.12 70.46,56.05 71.77,57.37 71.83,57.37 IC8.16 | v32.65,66.17 32.02,65.54 30.91,65.54 U2.8 | v17.42,31.17 16.87,31.17 v16.31,31.74 | v24.27,19.58 38.24,19.58 40.27,21.6 40.27,22.86 41.66,24.26 v42.57,24.26 | v64.86,44.03 65.05,43.84 65.05,40.66 64.74,40.36 62.68,40.36 v62.65,40.39
  Bottom 0.127: v71.21,54.38 71.13,54.3 71.13,52.92 68.14,49.92 68.14,49.33 66.44,47.64 v66.44,45.95 65.81,45.95 64.86,45.01 v64.86,44.03 | v32.65,66.17 32.65,68.4 28.94,72.12 28.9,72.12 28.88,72.13 28.45,72.13 26.5,70.18 11.31,70.18 4.15,63.03 4.15,53.94 13.65,44.44 13.65,39.55 14.14,39.06 14.42,39.06 15.75,37.74 15.75,32.3 v16.31,31.74 | v17.42,31.17 17.42,30.47 20.08,27.82 20.08,23.28 23.78,19.58 v24.27,19.58 | v42.57,24.26 45.3,26.98 47.25,26.98 49.77,29.5 50.39,29.5 54.38,33.48 54.58,33.48 55.35,34.25 55.35,34.53 59.62,38.8 61.16,38.8 62.49,40.13 62.49,40.39 v62.65,40.39
A5  (via drill 0.2)
  Top 0.127: v76.66,37.46 76.24,37.88 75.33,37.88 IC4.60
  Bottom 0.127: v76.66,37.46 76.83,37.29 76.83,36.14 77.2,35.76 78.23,35.76 79.51,34.48 79.51,23.34 73.71,17.54 73.71,3.84 21B.1
A5'  (via drill 0.2)
  Top 0.127: v65.95,45.36 65.34,45.96 65.34,47.38 IC4.92 | IC8.17 73.09,58.62 72.25,58.62 v71.04,57.41 69.77,57.41 67.79,59.39 v67.44,59.39 | v38.8,64.77 36.84,66.73 30.91,66.73 U2.7 | v40.47,63.09 42.08,63.09 42.78,62.4 52.35,62.4 54.44,64.49 62.69,64.49 v66.32,60.86
  Bottom 0.127: v65.95,45.36 66.74,45.36 68.42,47.03 68.42,49.79 72.05,53.43 72.05,56.41 v71.04,57.41 | v40.47,63.09 v38.8,64.77 | v66.32,60.86 66.32,60.51 v67.44,59.39
A6  (via drill 0.2)
  Top 0.127: v65.9,32.78 65.34,32.22 65.34,31.38 IC4.34 | v68.62,34.86 68.78,34.86 v70.09,33.55 | v70.16,21.39 70.16,20.28 v69.67,19.79 | 11A.1 48.28,3.84 48.28,16.57 49.26,17.55 v51.87,17.55
  Bottom 0.127: v65.9,32.78 66.25,32.78 68.33,34.86 v68.62,34.86 | v70.09,33.55 70.65,33.55 72.61,31.59 72.61,23.84 v70.16,21.39 | 20B.1 71.06,3.84 71.06,15.54 69.4,17.2 69.4,18.48 69.49,18.57 69.49,19.6 v69.67,19.79 69.01,19.79 68.84,19.62 66.75,19.62 66.46,19.91 62.64,19.91 61.56,18.83 60.4,18.83 59.12,17.55 v51.87,17.55 | v51.87,17.55
A6'  (via drill 0.2)
  Top 0.127: v66.04,49.54 64.85,48.36 64.85,47.45 IC4.93 | v70.37,58.27 70.65,58.27 72.26,59.88 73.09,59.88 IC8.18 73.17,59.88 v74.98,59.88 | v39.08,68.05 30.91,68.05 U2.6 | v77.92,62.19 77.92,59.46 v77.36,58.9
  Bottom 0.127: v66.04,49.54 66.04,49.82 70.09,53.87 70.09,57.99 v70.37,58.27 | v39.08,68.05 42.64,71.62 68.14,71.62 77.56,62.19 v77.92,62.19 | v77.36,58.9 75.96,58.9 v74.98,59.88
A7  (via drill 0.2)
  Top 0.127: v78.5,34.52 78.5,35.97 77.56,36.9 75.33,36.9 IC4.58 | v71.84,19.23 71.84,19.12 v68.05,15.34
  Bottom 0.127: v78.5,34.52 78.36,34.38 78.36,25.16 74.42,21.22 74.42,20.28 73.37,19.23 v71.84,19.23 | v68.05,15.34 68.61,14.77 68.61,3.84 19B.1
A7'  (via drill 0.2)
  Top 0.127: v65.27,49.54 64.29,48.56 64.29,47.45 IC4.94 | v70.37,59.04 70.58,59.04 72.68,61.14 73.09,61.14 IC8.19 | v42.15,70.36 33.21,70.36 32.16,69.31 30.91,69.31 U2.5
  Bottom 0.127: v70.37,59.04 69.81,58.48 69.81,56.07 68.11,54.37 68.11,53.33 66.71,51.92 66.67,51.88 66.67,51.66 66.36,51.36 65.93,51.36 65.91,51.39 65.31,51.39 | v42.15,70.36 47.18,70.36 48.16,71.34 62.9,71.34 64.78,69.45 64.78,68.89 65.97,67.7 67.86,67.7 68.9,66.66 68.9,65.4 70.51,63.79 70.51,62.4 68,59.88 68,58.06 64.43,54.5 64.43,52.27 65.31,51.39 | 65.22,51.49 65.27,51.43 v65.27,49.54 | 65.22,51.49 | 65.22,51.49 65.31,51.39
A8  (via drill 0.2)
  Top 0.127: v78.09,24.14 78.09,33.14 77.11,34.12 77.11,34.29 76.03,35.36 75.33,35.36 IC4.55 | v67.01,16.7 68.39,18.08 v69.96,18.08
  Bottom 0.127: v78.09,24.14 78.09,23.11 73.09,18.11 69.99,18.11 v69.96,18.08 | v67.01,16.7 66.66,16.34 66.66,4.4 66.1,3.84 18B.1
A8'  (via drill 0.2)
  Top 0.127: v63.73,49.05 63.73,47.45 IC4.95 | v44.81,46.96 44.67,46.96 44.32,46.61 43.27,46.61 43.06,46.82 43.06,47.52 U1.53 | v46.2,68.19 46.06,68.05 43.97,68.05 U2.27 | v48.79,66.87 48.79,66.52 v49.56,65.75 | v53.26,62.05 55.91,62.05 v57.17,60.79
  Bottom 0.127: v63.73,49.05 63.73,58.62 61.36,61 59.4,61 58.18,59.78 58.06,59.9 58,59.96 | 58,59.96 54.55,56.52 54.55,54.47 51.58,51.5 48.79,51.5 44.81,47.52 v44.81,46.96 | v46.2,68.19 47.46,68.19 v48.79,66.87 | v53.26,62.05 v49.56,65.75 | 58,59.96 v57.17,60.79
A9  (via drill 0.2)
  Top 0.127: IC4.53 76.01,34.38 77.34,33.06 77.34,23.72 v77.56,23.49 | v70.44,18.67 70.33,18.78 v68.97,18.78
  Bottom 0.127: v77.56,23.49 77.56,23 73.23,18.67 v70.44,18.67 | v68.97,18.78 68.81,18.94 68.31,18.94 65.58,16.21 65.58,8.35 63.51,6.29 63.51,3.84 17B.1
A9'  (via drill 0.2)
  Top 0.127: v39.15,49.26 39.43,49.54 41.31,49.54 42.5,48.36 42.5,47.59 U1.54 | v38.52,55.76 38.52,58.62 v40.13,60.23 | v45.5,66.17 44.53,66.17 43.97,66.73 U2.26 | v55.63,56.35 55.25,56.35 52.42,59.18 49.91,59.18 v49.69,58.97 | IC4.96 63.25,47.45 63.25,48.15 62.1,49.29 61.08,49.29 60.04,48.26 v59.45,48.26
  Bottom 0.127: v39.15,49.26 39.15,51.92 38.52,52.55 38.52,53.66 38.8,53.94 38.8,55.48 v38.52,55.76 | v40.13,60.23 40.13,60.44 45.5,65.82 45.5,66.03 | v59.45,48.26 59.44,48.24 58.67,48.24 56.19,50.71 56.19,55.78 v55.63,56.35 | v49.69,58.97 49.69,59.32 48.65,60.37 48.65,62.88 47.32,64.21 47.32,64.84 46.13,66.03 45.5,66.03 | 45.5,66.03 v45.5,66.17
A10  (via drill 0.2)
  Top 0.127: v72.07,27.86 72.15,27.77 72.77,27.77 75.54,30.54 75.54,30.96 75.19,31.31 73.3,31.31 IC4.50 | v64.99,16.11 64.99,17.3 69.09,21.39 v69.11,21.39
  Bottom 0.127: v72.07,27.86 72.07,24.38 72.19,24.26 72.19,23.84 70.3,21.95 69.67,21.95 v69.11,21.39 | v64.99,16.11 64.99,10.28 61,6.29 61,3.84 16B.1
A10'  (via drill 0.2)
  Top 0.127: v58.43,46.19 58.5,46.12 59.82,46.12 60.31,45.63 60.31,44.65 60.1,44.44 59.33,44.44 IC4.3 | v44.41,43.48 44.41,44.63 43.44,45.6 43.43,45.61 | 43.43,45.61 43.49,45.68 42.56,46.61 42.29,46.61 42.08,46.82 42.08,47.52 U1.55 | v37.61,59.67 37.61,61 40.27,63.65 41.94,63.65 42.57,63.02 43.9,63.02 U2.23 | 43.43,45.61 v43.26,45.43
  Bottom 0.127: v58.43,46.19 57.45,46.19 56.47,45.21 55.28,45.21 54.72,45.77 54.72,45.98 54.38,46.33 48.52,46.33 45.66,43.48 v44.41,43.48 | v37.61,59.67 37.61,57.44 39.08,55.97 39.08,53.66 38.8,53.38 38.8,52.69 39.71,51.78 39.71,46.76 41.42,45.04 42.87,45.04 v43.26,45.43
A11  (via drill 0.2)
  Top 0.127: v73.26,36.43 72.46,36.43 72.15,36.12 72.15,33.44 71.35,32.64 71.35,31.38 IC4.46 | v66.32,17.83 v68.62,20.14
  Bottom 0.127: v73.26,36.43 73.92,36.43 74.42,35.92 74.42,22.05 72.72,20.34 68.83,20.34 v68.62,20.14 | v66.32,17.83 66.32,17.84 63.97,17.84 59.64,13.52 59.64,7.76 58.42,7.15 15B.1
A11'  (via drill 0.2)
  Top 0.127: v54.72,48.01 54.72,47.66 58.5,43.88 59.27,43.88 IC4.4 | v41.66,45.58 41.66,47.45 41.59,47.52 U1.56 | v46.76,64.63 45.99,64.63 45.16,65.47 43.97,65.47 U2.25
  Bottom 0.127: v54.72,48.01 54.45,47.73 52.71,47.73 51.11,49.33 48.19,49.33 45.3,46.44 44.56,46.44 44.49,46.51 | v41.66,45.58 41.85,45.39 42.48,45.39 43.59,46.51 44.49,46.51 | v46.76,64.63 46.76,64.35 48.37,62.74 48.37,51.5 44.25,47.38 44.25,46.75 44.49,46.51
A12  (via drill 0.2)
  Top 0.127: IC4.42 69.25,31.31 69.25,29.5 69.04,29.29 69.04,22.99 64.92,18.87 v64.77,18.87
  Bottom 0.127: 14B.1 55.9,3.84 55.9,7.16 59.36,10.63 59.36,13.63 63.85,18.12 64.02,18.12 v64.77,18.87
A12'  (via drill 0.2)
  Top 0.127: v56.96,46.89 58.43,45.42 59.27,45.42 IC4.1 | v47.74,47.17 47.74,47.38 45.85,49.26 v44.94,49.26 | v41.1,46.19 41.1,47.45 41.03,47.52 U1.57 | v29.23,69.94 29.86,70.57 30.84,70.57 U2.4
  Bottom 0.127: v56.96,46.89 55.21,46.89 54.93,47.17 v47.74,47.17 | v44.94,49.26 44.39,49.26 42.19,47.06 | 42.19,47.06 41.31,46.19 v41.1,46.19 | v29.23,69.94 29.23,68.82 39.36,58.69 39.36,53.52 39.08,53.24 39.08,52.83 39.99,51.92 39.99,49.26 42.19,47.06
A13  (via drill 0.2)
  Top 0.127: v67.38,24.79 67.28,24.9 67.28,25.77 68.28,26.77 68.28,31.31 IC4.40 | v64.36,21.67 64.36,21.39 59.76,16.79 v56.79,16.79
  Bottom 0.127: v67.38,24.79 64.36,21.78 v64.36,21.67 | v56.79,16.79 56.79,9.69 53.38,6.29 53.38,3.84 13B.1
A13'  (via drill 0.2)
  Top 0.127: v41.1,48.98 40.55,48.42 40.55,47.59 U1.58 | v45.64,64.21 44.88,64.98 42.71,64.98 42.57,65.12 42.57,68.4 43.41,69.24 43.9,69.24 U2.28 | v57.94,47.45 58.98,46.4 61.57,46.4 61.78,46.61 IC4.99 | v48.86,48.01 48.86,49.96 v47.25,51.57
  Bottom 0.127: v41.1,48.98 41.8,48.98 41.94,48.84 43.55,48.84 45.85,51.15 45.85,51.57 | 45.85,51.57 45.85,60.16 45.57,60.44 45.57,64.14 v45.64,64.21 | v57.94,47.45 49.42,47.45 v48.86,48.01 | 45.85,51.57 v47.25,51.57
A14  (via drill 0.2)
  Top 0.127: v64.5,27.05 64.5,27.4 66.74,29.64 66.74,31.31 IC4.37 | v54.49,22.71 52.41,20.63 v52.41,16.16
  Bottom 0.127: v64.5,27.05 64.5,26.63 60.83,22.96 54.75,22.96 v54.49,22.71 | v52.41,16.16 52.51,16.06 52.51,15.05 51.71,14.25 51.71,4.75 50.8,3.84 12B.1
A14'  (via drill 0.2)
  Top 0.127: IC4.11 59.26,40.36 56.47,40.36 v56.4,40.36 | v40.07,41.16 39.39,41.83 39.39,42.56 39.91,43.07 v39.91,43.18 39.91,47.41 U1.59 | v28.11,70.29 29.65,71.83 30.84,71.83 U2.3 | v34.87,50.82 34.87,49.32 35.23,48.96 v36.53,48.96
  Bottom 0.127: v56.4,40.36 56.4,39.83 53.91,37.34 53.87,37.34 53.75,37.22 53.32,37.22 53.02,37.52 53.02,37.58 52.57,38.03 44.91,38.03 44.26,38.68 42.63,38.68 40.14,41.16 v40.07,41.16 | v28.11,70.29 28.11,68.75 34.96,61.9 34.96,50.91 v34.87,50.82 | v36.53,48.96 34.73,47.17 34.73,46.1 34.75,46.08 34.75,45.84 35.24,45.35 36.67,45.35 37.35,44.67 38.38,44.67 39.87,43.18 v39.91,43.18
A15  (via drill 0.2)
  Top 0.127: v50.06,18.54 51.02,19.5 51.02,20.41 54.16,23.55 55.26,23.55 57.91,26.2 61.35,26.2 65.76,30.61 65.76,31.31 IC4.35
  Bottom 0.127: v50.06,18.54 50.06,14.48 48.42,12.85 48.42,3.98 48.28,3.84 11B.1
A15'  (via drill 0.2)
  Top 0.127: v56.78,44.79 56.78,44.62 58.5,42.91 59.27,42.91 IC4.6 | v43.83,44.44 42.62,43.23 42.62,41.18 42.02,40.58 39.39,40.58 39.05,40.92 39.05,45.96 39.53,46.8 U1.60 | v48.72,65.75 48.23,66.24 48.23,69.24 44.39,73.08 43.97,73.08 U2.31 | v54.1,58.76 56.19,56.67 56.19,56.13 v55.62,55.56
  Bottom 0.127: v56.78,44.79 v56.78,44.8 57.78,44.8 58.98,46.01 58.98,46.4 58.64,46.75 58.5,46.75 | 58.5,46.75 57.59,46.75 57.17,46.33 55.35,46.33 54.79,46.89 48.23,46.89 47.11,45.77 45.16,45.77 v43.83,44.44 | v48.72,65.75 51.86,62.61 51.86,59.88 52.98,58.76 v54.1,58.76 | v55.62,55.56 55.62,50.53 58.5,47.66 58.5,46.75
A16'  (via drill 0.2)
  Top 0.127: v36.63,36.62 35.66,35.64 35.66,34.94 37.47,33.13 37.47,31.59 U1.12 | v55.49,45.77 55.49,45.14 58.22,42.42 59.27,42.42 IC4.7 | v28.67,71.62 30.14,73.08 30.84,73.08 U2.2 | v36.6,49.96 36.6,51.7 v36.27,52.03 | v33.66,43.19 33.24,43.6 v33.24,45.05
  Bottom 0.127: v36.63,36.62 36.63,37.46 36.84,37.67 36.84,39.96 37.88,40.99 37.88,42.08 37.58,42.39 36.95,42.39 35.67,43.66 34.59,43.66 34.11,43.19 v33.66,43.19 | 36.6,49.54 36.77,49.54 37.65,48.67 37.65,46.72 37.28,46.36 37.28,45.93 37.7,45.51 39.4,45.51 39.64,45.28 39.64,44.96 40.11,44.48 42.16,44.48 42.72,43.92 44.08,43.92 45.64,45.49 47.24,45.49 48.36,46.61 54.65,46.61 v55.49,45.77 | 36.6,49.54 36.35,49.54 36.07,49.26 36.06,49.26 35.79,48.99 35.55,48.99 33.24,46.68 v33.24,45.05 | v28.67,71.62 28.67,68.61 36.33,60.95 36.33,52.09 v36.27,52.03 | 36.6,49.54 v36.6,49.96
A17'  (via drill 0.2)
  Top 0.127: v57.17,42 57.24,41.93 59.27,41.93 IC4.8 | v54.44,65.89 53.96,65.89 53.26,65.19 48.51,65.19 47.95,65.75 47.95,68.61 44.74,71.83 43.97,71.83 U2.30 | v53.68,54.34 53.68,53.66 54.31,53.04 54.31,52.62 v53.61,51.92 | v53.01,48.28 53.01,43.81 55.56,41.27 v55.56,40.9 | U1.48 45.9,44.44 45.19,44.44 45.06,44.32 45.06,43.39 43.75,42.08 43.75,41.57 v43,40.82
  Bottom 0.127: v57.17,42 57.03,41.86 55.72,41.86 55.03,41.17 | 55.03,41.17 54.47,40.6 48.9,40.6 48.41,41.09 43.27,41.09 v43,40.82 | v54.44,65.89 54.44,64.7 55.28,63.86 55.28,61.7 55.21,61.63 55.21,57.62 54.26,56.67 54.26,54.92 v53.68,54.34 | v53.61,51.92 53.01,51.32 v53.01,48.28 | v55.56,40.9 55.49,40.83 55.37,40.83 55.03,41.17
A18'  (via drill 0.2)
  Top 0.127: v55.91,42.49 56.96,41.44 59.27,41.44 IC4.9 | v33.63,73.5 32.79,74.34 30.91,74.34 U2.1 | v35.58,71.55 42.5,71.55 42.99,71.06 45.08,71.06 47.32,68.82 47.32,65.4 v49.21,63.51 | v49.21,52.06 49.21,51.22 49.14,51.15 49.14,48.49 50.81,46.82 v50.81,43.47 50.56,43.22 47.6,43.22 46.88,43.94 46.17,43.94 U1.47
  Bottom 0.127: v55.91,42.49 55.56,42.14 v52,42.14 50.81,43.33 v50.81,43.47 | v35.58,71.55 v33.63,73.5 | v49.21,63.51 49.21,60.65 50.53,59.32 50.53,55.69 49.21,54.36 v49.21,52.06
ALE  (via drill 0.2)
  Top 0.127: v33.56,51.03 34.54,50.05 U1.70 | v33.26,52.16 v33.25,52.16 32.76,52.16 v31.05,53.87 | v29.16,59.67 35.52,59.67 v37.33,61.49 | v43.83,54.43 44.6,54.43 45.02,54.85 47.81,54.85 49.56,56.6 53.05,56.6 53.32,56.32 54.1,56.32 55.49,54.94 56,54.94 56.4,55.34 58.64,55.34 58.74,55.23 58.74,54.35 61.14,51.96 61.74,51.96 62.01,51.69 64.16,51.69 64.16,51.72 64.31,51.87 64.31,52.53 66.12,54.34 68.72,54.34 71.98,51.08 73.09,51.08 IC8.11
  Bottom 0.127: v33.56,51.03 33.56,51.86 v33.26,52.16 | v31.05,53.87 31.05,57.79 v29.16,59.67 | v37.33,61.49 37.33,61.14 40.89,57.58 40.89,57.37 v43.83,54.43
AREF
  Top 0.127: C6.1 18.05,29.98 18.4,29.98 19.13,29.25 20.7,29.25 21.06,29.62 21.06,31.89 22.48,33.31 25.88,33.31 27.15,34.58 U1.98
B0  (via drill 0.2)
  Top 0.127: v31.39,36.06 31.39,35.71 30.77,35.08 30.07,35.08 U1.97 | IC9.12 13.16,56.11 13.65,55.62 17.92,55.62 18.63,54.91 v18.63,54.49
  Bottom 0.127: v31.39,36.06 31.39,37.55 25.42,43.53 25.42,45.72 21.02,50.12 21.02,50.83 20.22,51.63 20.22,53.01 18.73,54.49 v18.63,54.49
B1  (via drill 0.2)
  Top 0.127: v19.8,41.58 20.92,40.46 23.01,40.46 23.29,40.18 23.29,39.34 23.15,39.2 21.06,39.2 20.78,38.92 20.78,38.09 20.99,37.88 23.08,37.88 25.32,35.64 30,35.64 U1.96 | v12.17,53.09 12.17,53.13 10.79,54.51 10.79,55.48 12.67,57.37 13.09,57.37 IC9.13
  Bottom 0.127: v19.8,41.58 19.8,48.15 17.49,50.45 14.79,50.45 14.51,50.73 14.47,50.73 12.68,52.51 12.68,52.59 v12.17,53.09
B2  (via drill 0.2)
  Top 0.127: v26.65,37.88 28.39,36.13 30,36.13 U1.95 | v15.26,57.58 15.05,57.58 14,58.62 13.16,58.62 IC9.14
  Bottom 0.127: v26.65,37.88 26.65,39.48 24.84,41.28 24.84,45.46 19.78,50.53 19.78,52.49 15.26,57.01 v15.26,57.58
B3  (via drill 0.2)
  Top 0.127: v32.44,37.18 31.88,36.62 30.07,36.62 U1.94 | IC9.15 13.16,59.98 14.39,59.98 v14.77,59.6
  Bottom 0.127: v32.44,37.18 32.44,38.58 26.62,44.4 26.62,44.51 26.34,44.79 26.34,45.6 22.11,49.83 22.11,50.75 21.81,51.06 21.22,51.06 20.5,51.78 20.5,53.13 19.17,54.46 19.17,54.8 15.48,58.49 15.48,58.9 v14.77,59.6
B4  (via drill 0.2)
  Top 0.127: v28.25,37.04 30,37.04 U1.93 | v23.99,36.22 23.13,35.36 v19.17,35.36 | v17.91,34.87 16.45,34.87 v16.31,35.01 | v14.77,48.71 14.77,49.89 v16.17,51.29 | v14.73,56.85 14.35,57.23 14.35,57.86 14.14,58.06 12.05,58.06 11.84,58.27 11.84,60.37 12.6,61.14 13.09,61.14 IC9.16
  Bottom 0.127: v28.25,37.04 24.81,37.04 v23.99,36.22 | v19.17,35.36 18.4,35.36 v17.91,34.87 | v16.31,35.01 16.31,38.72 15.4,39.62 15.4,48.08 v14.77,48.71 | v16.17,51.29 16.17,55.41 v14.73,56.85
B5  (via drill 0.2)
  Top 0.127: v26.65,40.25 29.3,37.6 30,37.6 U1.92 | v20.35,50.73 19.8,50.73 18.38,52.15 18.36,52.13 14.66,52.13 14.35,51.81 12.7,51.81 10.51,54 10.51,57.01 11.52,58.01 11.52,58.44 11.24,58.72 11.24,61.15 12.55,62.47 13.09,62.47 IC9.17
  Bottom 0.127: v26.65,40.25 26.65,41.81 25.14,43.32 25.14,45.59 20.35,50.38 v20.35,50.73
B6  (via drill 0.2)
  Top 0.127: U1.91 29.33,38.08 28.51,38.9 28.51,39.16 26.65,41.02 26.65,46.92 26.62,46.94 26.62,47.4 26.65,47.42 26.65,49.29 22.24,53.7 16.33,53.7 15.62,52.98 v14.88,52.98 | v10.74,63.61 12.98,63.61 IC9.18
  Bottom 0.127: v14.88,52.98 14.63,53.24 14.63,53.92 10.88,57.67 10.72,57.67 10.35,58.04 10.35,63.22 v10.74,63.61
B7  (via drill 0.2)
  Top 0.127: 29.19,38.71 29.33,38.58 U1.90 29.9,38.71 29.19,38.71 | 29.19,38.71 28.79,39.12 28.79,39.28 26.92,41.14 26.92,49.41 22.36,53.98 15.88,53.98 v15.52,53.62 | v14.95,54.91 14.9,54.91 13.48,53.48 v13.26,53.48 | v9.66,64.04 9.9,64.04 10.87,65.01 IC9.19
  Bottom 0.127: v15.52,53.62 14.95,54.2 v14.95,54.91 | v13.26,53.48 13.26,54.31 9.66,57.9 v9.66,64.04
CFG_CLK  (via drill 0.2)
  Top 0.127: IC4.54 74.06,34.88 73.53,34.35 73.1,34.35 72.8,34.66 72.8,35.09 73.1,35.39 73.15,35.39 73.79,36.03 73.79,36.79 73.53,37.05 71.69,37.05 71.69,37.04 70.91,37.04 v70.38,36.51 | v69.58,37.69 69.58,38.33 v68.3,39.61 | v63.93,40.89 63.19,40.89 62.8,41.28 62.8,41.38 61.36,42.81 v61.34,42.81 | U1.79 31.31,44.08 32.8,45.57 33.46,45.57 33.76,45.26 33.76,45.07 v34.09,44.74
  Bottom 0.127: v70.38,36.51 69.58,37.31 v69.58,37.69 | v68.3,39.61 67.2,40.71 64.87,40.71 64.7,40.89 v63.93,40.89 | v61.34,42.81 60.74,43.41 57.12,43.41 52.47,43.41 51.13,44.76 48.89,44.76 48.59,44.45 48.59,43.77 46.85,42.04 42.32,42.04 42.14,42.21 41.01,42.21 40.7,42.52 39.51,42.52 39.3,42.73 39.3,43.36 38.41,44.24 37.33,44.24 36.97,44.59 34.24,44.59 v34.09,44.74
CFG_DATA  (via drill 0.2)
  Top 0.127: IC4.74 75.17,44.77 74.44,44.77 73.65,43.98 73.65,43.27 v73.41,43.03 | v71.24,39.25 68.41,42.09 v68.1,42.09 | v64.1,44.06 63.86,44.3 63.75,44.3 62.78,45.28 61.43,45.28 v61.39,45.24 | v36.04,46.15 36.04,46.17 35.55,46.67 35.55,47.56 U1.68
  Bottom 0.127: v73.41,43.03 73.41,39.94 72.44,38.96 72.41,38.96 72.37,38.93 71.56,38.93 v71.24,39.25 | v68.1,42.09 65.95,42.09 64.1,43.94 v64.1,44.06 | v61.39,45.24 60.55,44.4 60.55,44.31 60.49,44.25 52.82,44.25 51.37,45.7 48.5,45.7 47.73,44.93 47.73,44.1 46.53,42.9 43.16,42.9 42.67,43.39 41.79,43.39 40.98,44.2 40,44.2 39.36,44.84 39.36,45.16 39.29,45.23 37.58,45.23 36.67,46.15 v36.04,46.15
CFG_RESET  (via drill 0.2)